# EAGLE board Plant Controller Switching Board (EAGLE 7.6.0)
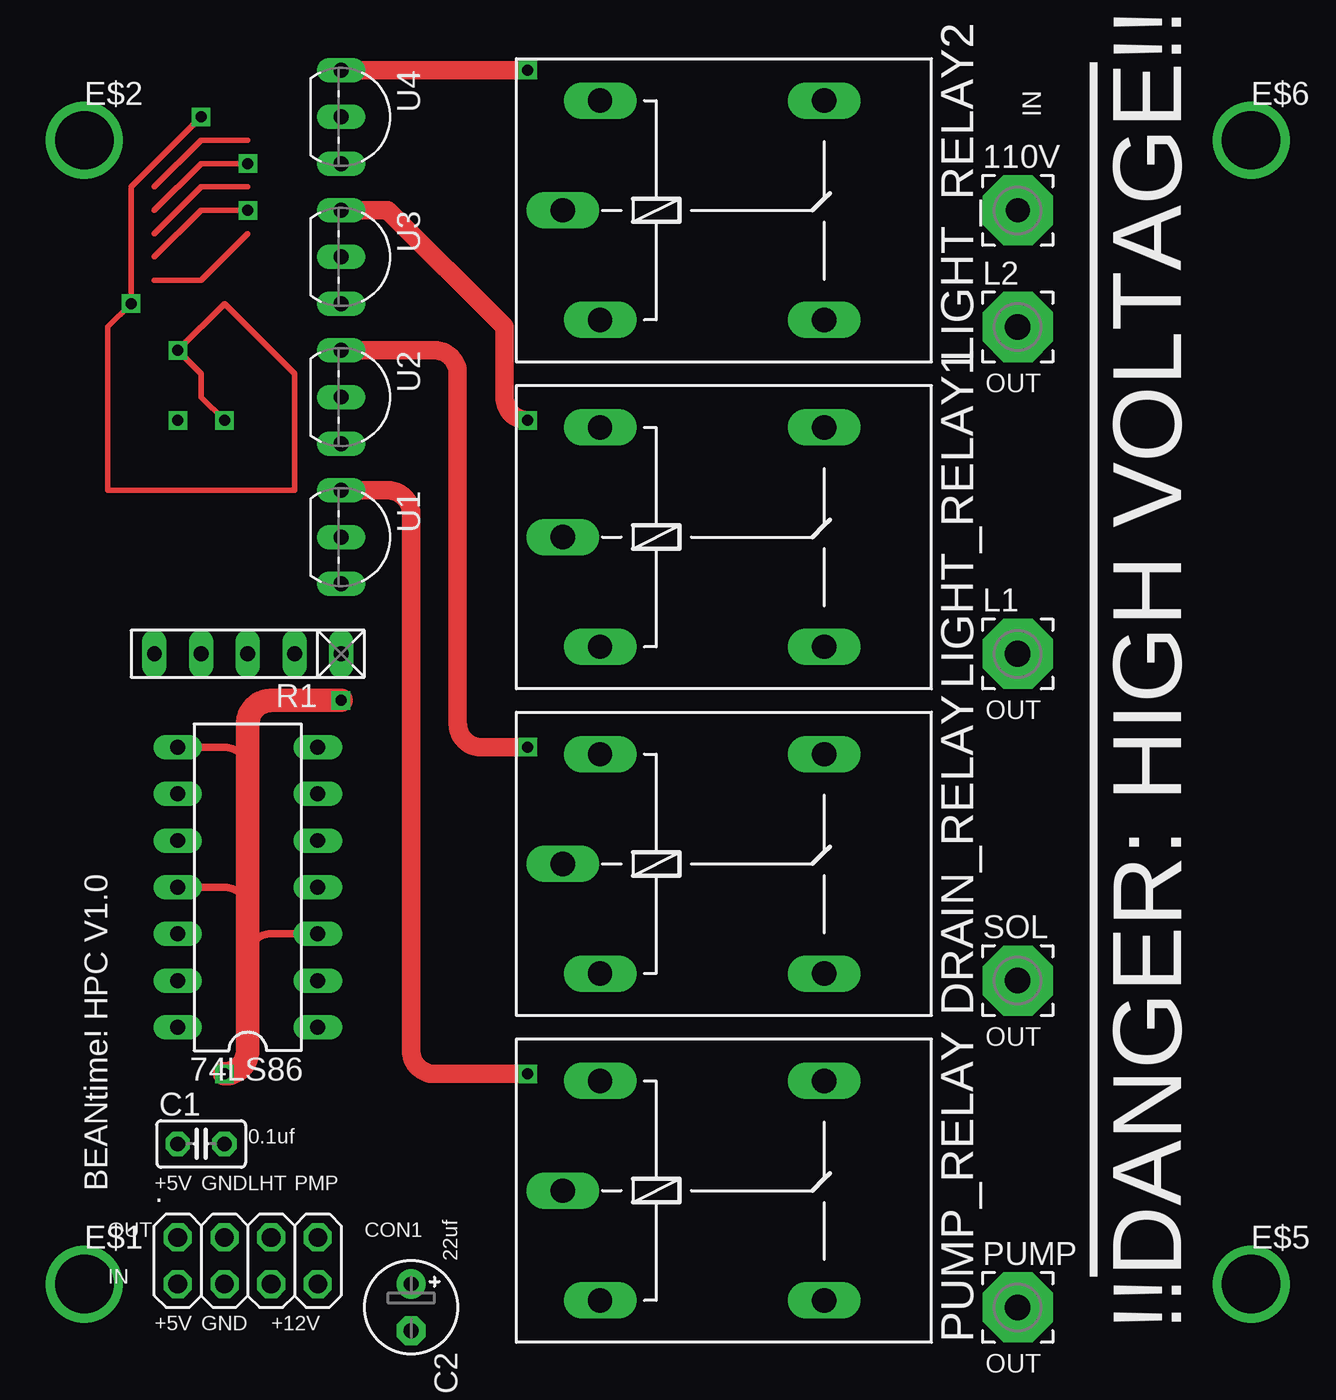
[diagram p0: board, top side]
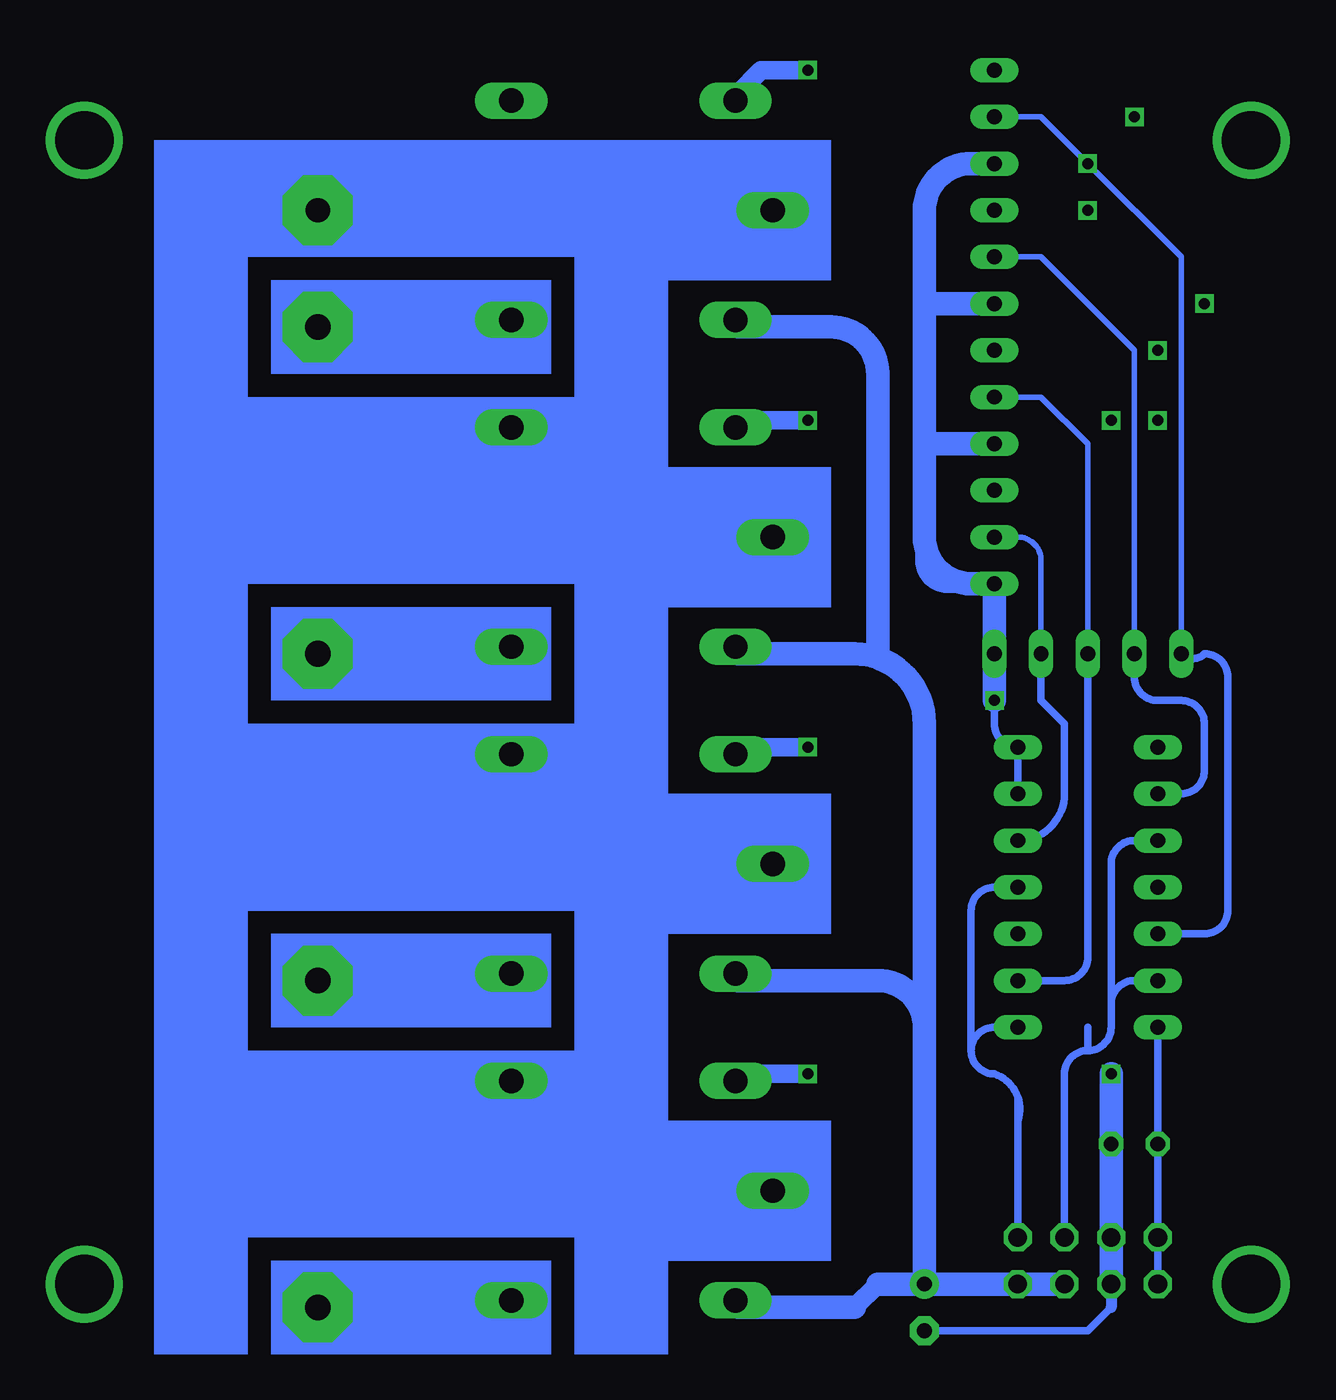
[diagram p1: board, bottom side, seen from below]

No outline drawn. Coordinates in mm, seen from the top.
Copper layers (1*16): Top 0.035mm / dielectric 1.5mm / Bottom 0.035mm
Design rules "default": minimum track width 10mil, minimum drill 24mil, track to track 8mil, track to pad 8mil, pad to pad 8mil, via to via 8mil, smd to smd 8mil, copper to edge 40mil, drill to drill 8mil, minimum pad ring 10mil, minimum via ring 8mil, stop-mask expansion 4mil, vias tented up to drill 0mil, thermal gap 10mil

## Footprints (pad centres in the part's own frame; a part is rotated, then mirrored left to right if it is on the bottom)
DIL14 = drill 0.813 long: 1 -7.62,-3.81; 2 -5.08,-3.81; 3 -2.54,-3.81; 4 0,-3.81; 5 2.54,-3.81; 6 5.08,-3.81; 7 7.62,-3.81; 8 7.62,3.81; 9 5.08,3.81; 10 2.54,3.81; 11 0,3.81; 12 -2.54,3.81; 13 -5.08,3.81; 14 -7.62,3.81
3,81/1,3 = drill 1.321 pad 3.81 octagon: 1 0,0
2X04 = drill 1.016 octagon: 1 -3.81,-1.27; 2 -3.81,1.27; 3 -1.27,-1.27; 4 -1.27,1.27; 5 1.27,-1.27; 6 1.27,1.27; 7 3.81,-1.27; 8 3.81,1.27
C025-025X050 = drill 0.813 octagon: 1 -1.27,0; 2 1.27,0
E2,5-5 = drill 0.813 pad 1.6: + -1.27,0 | drill 0.813 pad 1.6 octagon: - 1.27,0
G5LE = drill 1.321 long: 1 -7.493,-5.969; 2 -7.493,5.969; O 4.699,5.969; P -9.525,0; S 4.699,-5.969
PAD_0.1250 = drill 3.175 pad 3.175: 1 0,0
3,81/1,4 = drill 1.397 pad 3.81 octagon: 1 0,0
RN-5 = drill 0.813 long: 1 -5.08,0; 2 -2.54,0; 3 0,0; 4 2.54,0; 5 5.08,0
TO92-EBC = drill 0.813 long: B 0,-1.27; C 2.54,-1.27; E -2.54,-1.27

## Placement (x,y rotation side)
74LS86  [DIL14]  13.97,26.67 90 top
110V  [3,81/1,3]  55.88,63.5 0 top
.  [2X04]  13.97,6.35 0 top
C1  [C025-025X050]  11.43,12.7 0 top
C2  [E2,5-5]  22.86,3.81 270 top
DRAIN_RELAY  [G5LE]  40.64,27.94 0 top
E$1  [PAD_0.1250]  5.08,5.08 0 top
E$2  [PAD_0.1250]  5.08,67.31 0 top
E$5  [PAD_0.1250]  68.58,5.08 0 top
E$6  [PAD_0.1250]  68.58,67.31 0 top
L1  [3,81/1,4]  55.88,39.37 0 top
L2  [3,81/1,4]  55.88,57.15 0 top
LIGHT_RELAY1  [G5LE]  40.64,45.72 0 top
LIGHT_RELAY2  [G5LE]  40.64,63.5 0 top
PUMP  [3,81/1,4]  55.88,3.81 0 top
PUMP_RELAY  [G5LE]  40.64,10.16 0 top
R1  100K  [RN-5]  13.97,39.37 180 top
SOL  [3,81/1,4]  55.88,21.59 0 top
U1  2N2222  [TO92-EBC]  20.32,45.72 270 top
U2  2N2222  [TO92-EBC]  20.32,53.34 270 top
U3  2N2222  [TO92-EBC]  20.32,60.96 270 top
U4  2N2222  [TO92-EBC]  20.32,68.58 270 top

## Library data of the parts
74LS86 = 74xx-us
110V L1 L2 PUMP SOL = wirepad
. = pinhead
C1 = resistor
C2 = rcl
DRAIN_RELAY LIGHT_RELAY1 LIGHT_RELAY2 PUMP_RELAY = relay
E$1 E$2 E$5 E$6 = special-drill
R1 = resistor-net
U1-U4 = transistor-neu-to92

## Nets
S$1: 74LS86.14 ..1 ..2
S$2: 74LS86.12 R1.5 U4.B
S$4: 74LS86.3 74LS86.6 74LS86.7 74LS86.8 74LS86.11 ..3 ..4 C2.- R1.1 U1.C U2.C U3.C U4.C
S$5: ..5 C2.+
S$6: 74LS86.10 74LS86.13 ..6
S$7: U1.B
S$8: 74LS86.1
S$9: 74LS86.2 R1.3 U2.B
S$10: ..8
S$11: U1.E
S$12: U2.E
S$14: 74LS86.9 R1.4 U3.B
S$16: 74LS86.5 R1.2
S$19: U4.E
S$20: U3.E

## Tracks (layer width: path | path; a pad name or v marks a point on that pad's centre or on a via)
S$1
  Bottom 0.406: 74LS86.14 ..2 ..1
S$2  (via drill 0.6)
  Top 0.305: 8.89,63.5 11.43,66.04 v13.97,66.04
  Bottom 0.305: R1.5 8.89,60.96 v13.97,66.04 16.51,68.58 U4.B
  Bottom 0.406: R1.5 arc-90 7.62,39.37 arc90 6.35,38.1 6.35,25.4 arc90 7.62,24.13 74LS86.12
S$3
  Bottom 1.27: 25.4,39.37 25.4,54.61 arc-90 27.94,57.15 33.02,57.15
S$4  (via drill 0.6)
  Top 0.406: 74LS86.8 12.7,34.29 arc-90 13.97,33.02 13.97,25.4 | 74LS86.11 12.7,26.67 arc-90 13.97,25.4 | 74LS86.3 15.24,24.13 arc90 13.97,22.86 | 13.97,22.86 13.97,25.4 | 13.97,17.78 13.97,22.86 | 13.97,35.56 arc-90 15.24,36.83
  Top 1.016: 15.24,36.83 arc90 13.97,35.56 13.97,33.02 13.97,17.78 arc-90 v12.7,16.51
  Top 1.27: v12.7,16.51 arc90 13.97,17.78 13.97,35.56 arc-90 15.24,36.83 v19.05,36.83
  Bottom 0.406: v19.05,36.83 19.05,35.56 arc-90 74LS86.7 74LS86.6 | 12.7,3.81 13.97,2.54 C2.-
  Bottom 0.61: ..3 12.7,3.81
  Bottom 1.016: v12.7,16.51 ..4 | v19.05,36.83 R1.1 U1.C | 20.32,43.18 21.59,43.18 arc90 22.86,44.45 22.86,45.72 | 22.86,63.5 arc90 20.32,66.04
  Bottom 1.27: ..4 ..3 v12.7,16.51 | U4.C 20.32,66.04 arc-90 22.86,63.5 22.86,58.42 | 22.86,58.42 22.86,50.8 | 22.86,50.8 22.86,45.72 arc-90 20.32,43.18 U1.C v19.05,36.83 | U2.C 22.86,50.8 | U3.C 22.86,58.42
  other vias: 19.05,39.37
S$5
  Bottom 0.305: C2.+ 24.13,5.08
  Bottom 1.016: 25.4,5.08 26.67,3.81
  Bottom 1.27: ..5 C2.+ | C2.+ 22.86,19.05 | 22.86,19.05 arc-90 25.4,21.59 33.02,21.59 | 22.86,19.05 22.86,35.56 arc-90 26.67,39.37 33.02,39.37 | C2.+ 25.4,5.08 | 26.67,3.81 33.02,3.81
S$6
  Bottom 0.406: 74LS86.13 11.43,21.59 arc-90 12.7,20.32 | 74LS86.10 11.43,29.21 arc-90 12.7,27.94 12.7,20.32 | ..6 15.24,16.51 arc90 13.97,17.78 | 13.97,17.78 13.97,19.05 | 12.7,20.32 12.7,19.05 arc90 13.97,17.78
S$7
  Bottom 0.305: 16.51,40.64 16.51,44.45 arc-90 17.78,45.72 U1.B
S$8
  Bottom 0.406: 74LS86.1 19.05,19.05 arc-90 20.32,17.78 | 19.05,26.67 arc-90 20.32,25.4 20.32,17.78 | 20.32,17.78 arc-90 19.05,16.51 arc90 17.78,13.97
S$9
  Bottom 0.305: U2.B 16.51,53.34 13.97,50.8 R1.3
  Bottom 0.406: R1.3 13.97,22.86 arc90 15.24,21.59 74LS86.2
S$10
  Bottom 0.406: 17.78,15.24 ..8
S$11  (via drill 0.6)
  Top 1.016: U1.E 21.59,48.26 arc-90 22.86,46.99 22.86,17.78 arc90 24.13,16.51 v29.21,16.51
  Bottom 1.016: v29.21,16.51 33.02,16.51
S$12  (via drill 0.6)
  Top 1.016: U2.E 24.13,55.88 arc-90 25.4,54.61 25.4,35.56 arc90 26.67,34.29 v29.21,34.29
  Bottom 1.016: v29.21,34.29 33.02,34.29
S$13
  Bottom 2.54: 30.48,10.16 36.83,10.16 arc90 39.37,12.7 39.37,27.94 | 39.37,27.94 39.37,45.72 30.48,45.72 | 30.48,27.94 39.37,27.94
S$14
  Bottom 0.305: U3.B 16.51,60.96 11.43,55.88 R1.4
  Bottom 0.406: R1.4 11.43,38.1 arc-90 10.16,36.83 8.89,36.83 arc90 7.62,35.56 7.62,33.02 arc90 8.89,31.75 74LS86.9
S$15  (via drill 0.6)
  other vias: 10.16,52.07
S$16
  Bottom 0.406: R1.2 16.51,36.83 15.24,35.56 15.24,31.75 arc90 74LS86.5
S$17
  Top 0.305: 8.89,62.23 11.43,64.77 13.97,64.77
S$18  (via drill 0.6)
  Top 1.016: 27.94,53.34 arc90 v29.21,52.07
  Bottom 1.016: v29.21,52.07 33.02,52.07
S$19  (via drill 0.6)
  Top 1.016: U4.E v29.21,71.12
  Bottom 1.016: v29.21,71.12 31.75,71.12 33.02,69.85
S$20
  Top 1.016: 27.94,53.34 27.94,57.15 21.59,63.5 U3.E
S$21  (via drill 0.6)
  Top 0.305: 8.89,60.96 11.43,63.5 v13.97,63.5
S$22  (via drill 0.6)
  Top 0.305: v11.43,68.58 7.62,64.77 v7.62,58.42 6.35,57.15 6.35,48.26 16.51,48.26 16.51,54.61 12.7,58.42 v10.16,55.88 11.43,54.61 11.43,53.34 v12.7,52.07
S$23
  Top 0.305: 8.89,64.77 11.43,67.31 13.97,67.31
S$24
  Bottom 2.54: 30.48,63.5 57.15,63.5
S$25
  Top 0.305: 8.89,59.69 11.43,59.69 13.97,62.23
(copper drawn outside any net)
  shapes: Bottom area x37

## Text on the board
tNames: IN | OUT | OUT | OUT | 0.1uf | BEANtime! HPC V1.0 | +5V | GND | LHT | PMP | OUT | CON1 | 22uf | IN | +5V | GND | +12V | !!!DANGER: HIGH VOLTAGE!!! | OUT